# Altium PCB Test Fit Schematic.PcbDoc
Units mil, origin at the board's own origin, x right, y up, seen from the top; angles counter-clockwise.
Board outline 1635 x 4000 mil, 2 copper layers (Top Layer, Bottom Layer); 3 components, 0 nets, 45 pads, 0 vias.
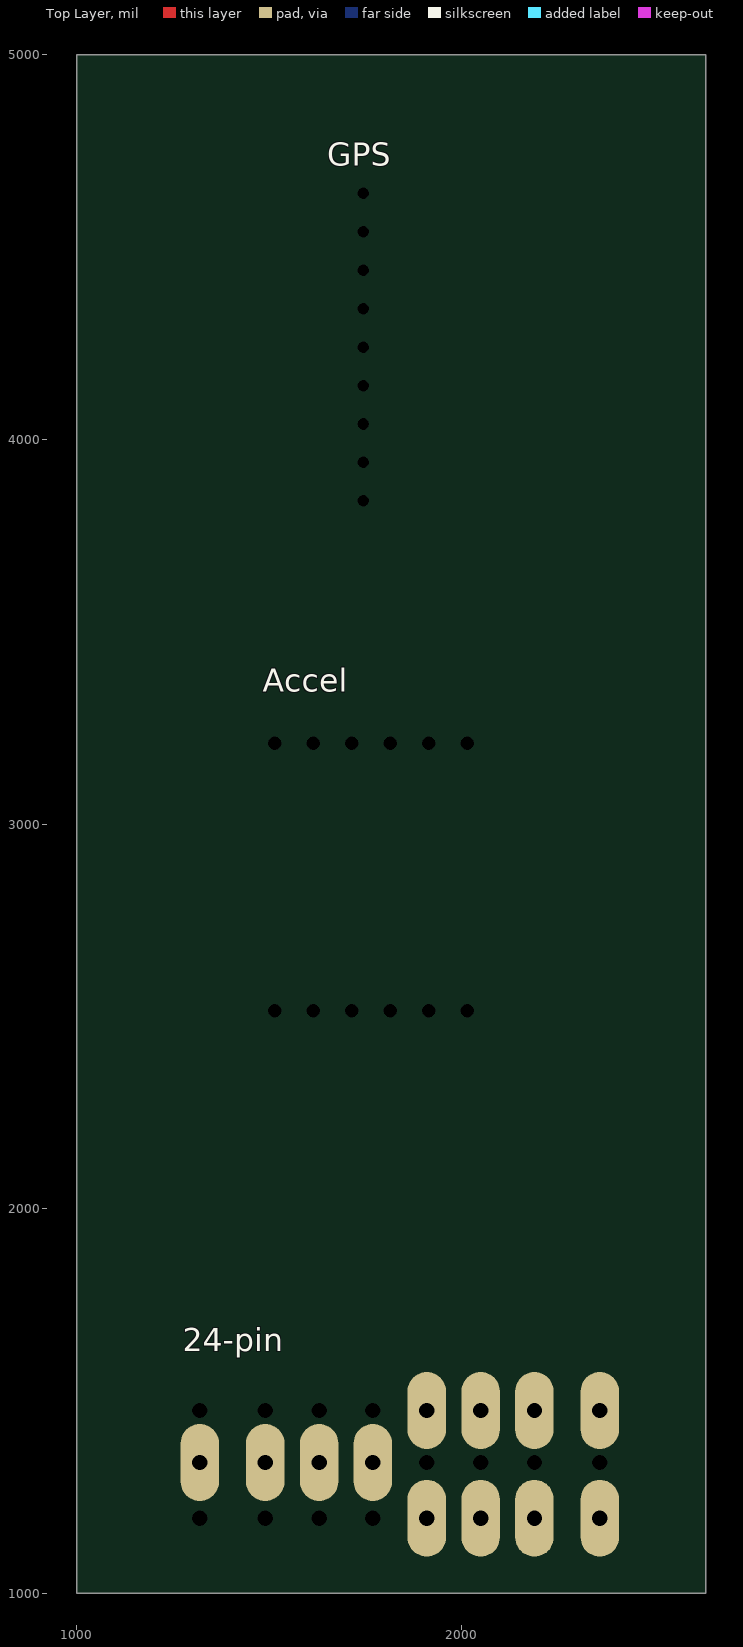
[diagram p0: Top Layer view]
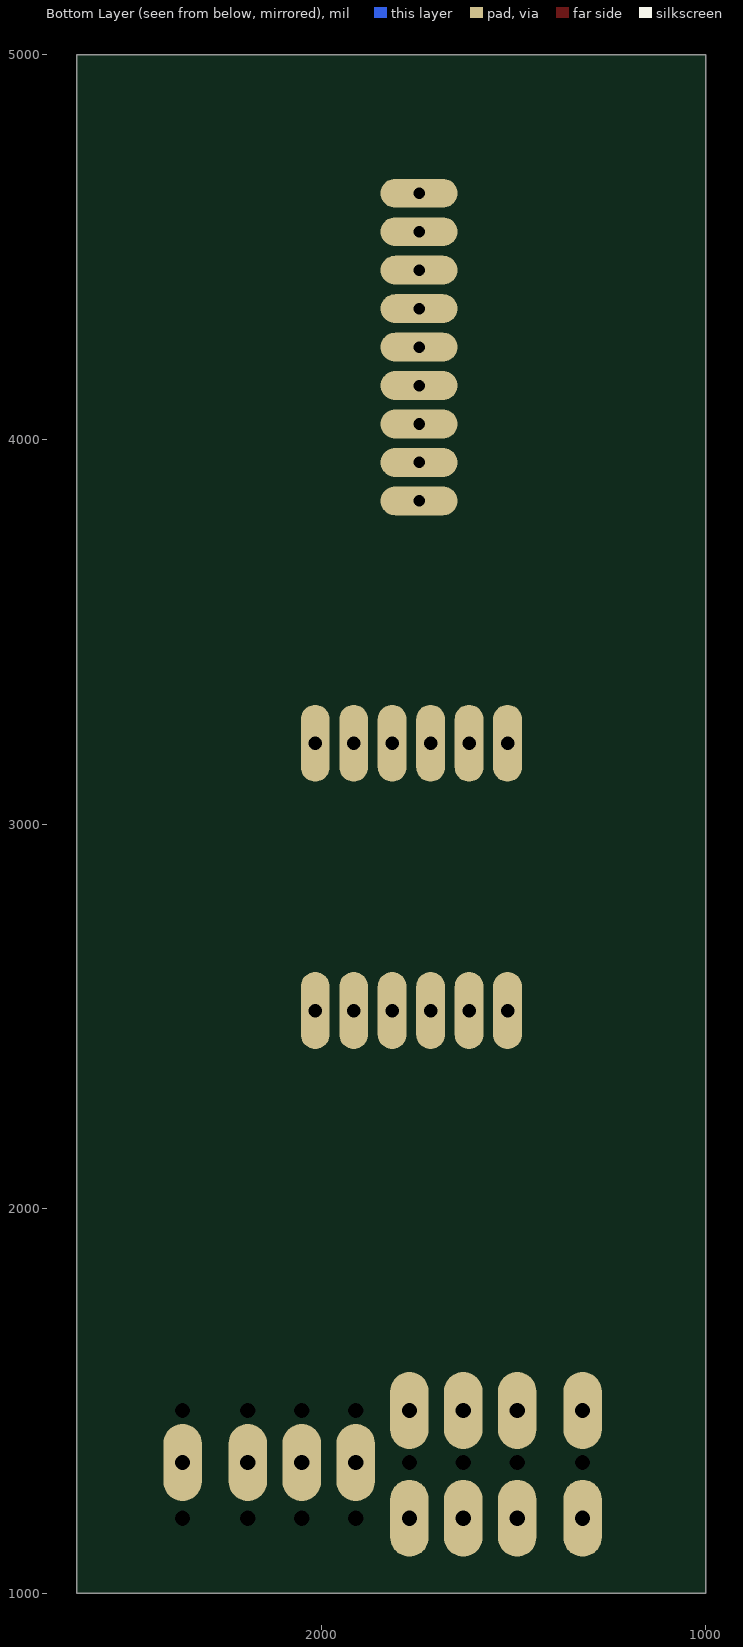
[diagram p1: Bottom Layer view, seen from below]

## Layer stack, top to bottom
Top Solder: solder mask 0.4, Solder Resist, Dk 3.5
Top Layer: signal copper 1.4
Dielectric 1: dielectric 12.6, FR-4, Dk 4.8
Bottom Layer: signal copper 1.4
Bottom Solder: solder mask 0.4, Solder Resist, Dk 3.5

## Board outline
1000,1000 2635,1000 2635,5000 1000,5000

## Design rules (kind name [scope] priority, off if disabled: settings)
Clearance [All] p1: gap=10 ignorepadtopadclearanceinfootprint=FALSE
PolygonConnect [All] p1: connectstyle=Relief reliefconductorwidth=10 reliefentries=4 polygonreliefangle="90 Angle" airgapwidth=10
RoutingVias [All] p1: holewidth=28 width=50 viastyle="Through Hole" minholewidth=28 minwidth=50 maxholewidth=28 maxwidth=50
SolderMaskExpansion [All] p1: expansion=4 istentingtop=FALSE
Width [All] p1: maxlimit=10 minlimit=10 preferedwidth=10
30 further rules are at their usual default settings.

## Components (designator, comment, footprint, x,y, rotation, side; value= is the part's Value field where it differs from the comment)
24-pin "DJ7242" DJ7242-Footprint-1 2360,1550 r180 top
Accel "Accelerometer Header" "Accelerometer Header-Footprint-1" 2015,3305 r180 top
GPS "GPS" GPS-Footprint-1 1890,3795 r90 top

## Footprints (in the part's own frame and the unit in brackets; to place one, negate y for a bottom-side part, rotate by r counter-clockwise, add the part's x,y. Pads: shape width x height; smd on the part's side, far side on the other; paste and mask are expansions set on the pad)
"Accelerometer Header-Footprint-1" [mil]
  round 0 / inner round 60 / far side oval 75x200 hole 35: 1(0,95) 2(100,95) 3(200,95) 4(300,95) 5(400,95) 6(500,95) 7(0,790) 8(100,790) 9(200,790) 10(300,790) 11(400,790) 12(500,790)
DJ7242-Footprint-1 [mil]
  oval 100x200 / inner round 60 / far side round 0 hole 40: 1(0,355) 2(170,355) 3(310,355) 4(450,355) 13(590,210) 14(730,210) 15(870,210) 16(1040,210) 17(0,75) 18(170,75) 19(310,75) 20(450,75)
  round 0 / inner round 60 / far side oval 100x200 hole 40: 5(590,355) 6(730,355) 7(870,355) 8(1040,355) 9(0,210) 10(170,210) 11(310,210) 12(450,210) 21(590,75) 22(730,75) 23(870,75) 24(1040,75)
GPS-Footprint-1 [mil]
  round 0 / inner round 60 / far side oval 75x200 hole 30: 1(45,145) 2(145,145) 3(245,145) 4(345,145) 5(445,145) 6(545,145) 7(645,145) 8(745,145) 9(845,145)

## Part data
24-pin: library part CMP-00030-00002-2, "24-pin connector"
Accel: library part CMP-002-00071-2, "Header for Adafruit Accelerometer"
GPS: library part CMP-002-00072-1, "Adafruit GPS chip"

## Nets (pads, with @x,y where several pads share a name; then routed paths per layer and width w, separated by ;. In a path a pad name is that pad's centre, name@x,y a point inside that pad or via, vN(x,y) a via of type N, cw(c..) or ccw(c..) an arc to the next point about the centre after c; other vN are vias at no path point)
pads on no net: 24-pin.1 24-pin.2 24-pin.3 24-pin.4 24-pin.5 24-pin.6 24-pin.7 24-pin.8 24-pin.9 24-pin.10 24-pin.11 24-pin.12 24-pin.13 24-pin.14 24-pin.15 24-pin.16 24-pin.17 24-pin.18 24-pin.19 24-pin.20 24-pin.21 24-pin.22 24-pin.23 24-pin.24 Accel.1 Accel.2 Accel.3 Accel.4 Accel.5 Accel.6 Accel.7 Accel.8 Accel.9 Accel.10 Accel.11 Accel.12 GPS.1 GPS.2 GPS.3 GPS.4 GPS.5 GPS.6 GPS.7 GPS.8 GPS.9